# EAGLE board usb-c_dlt (EAGLE 9.4.2)
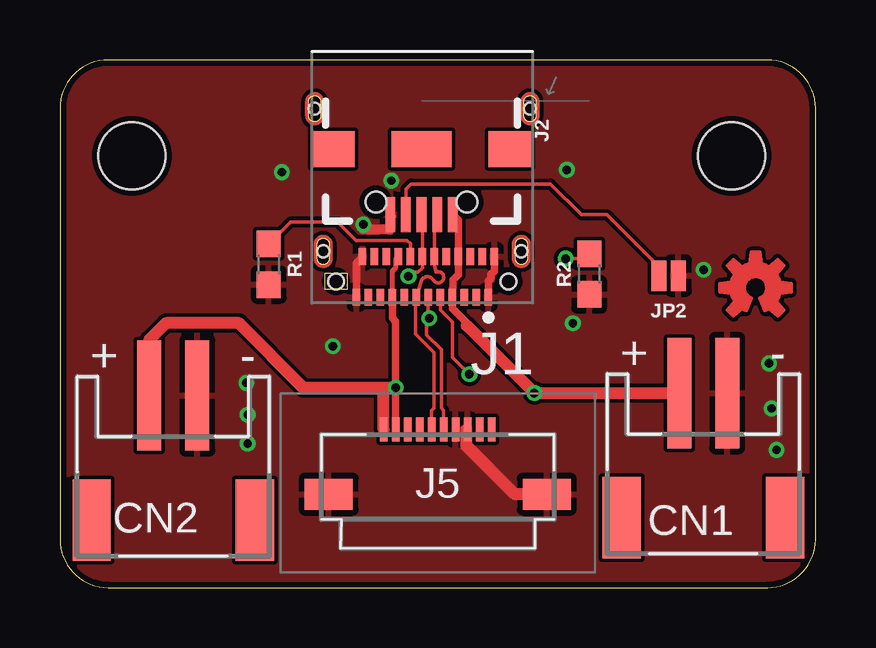
[diagram p0: board, top side]
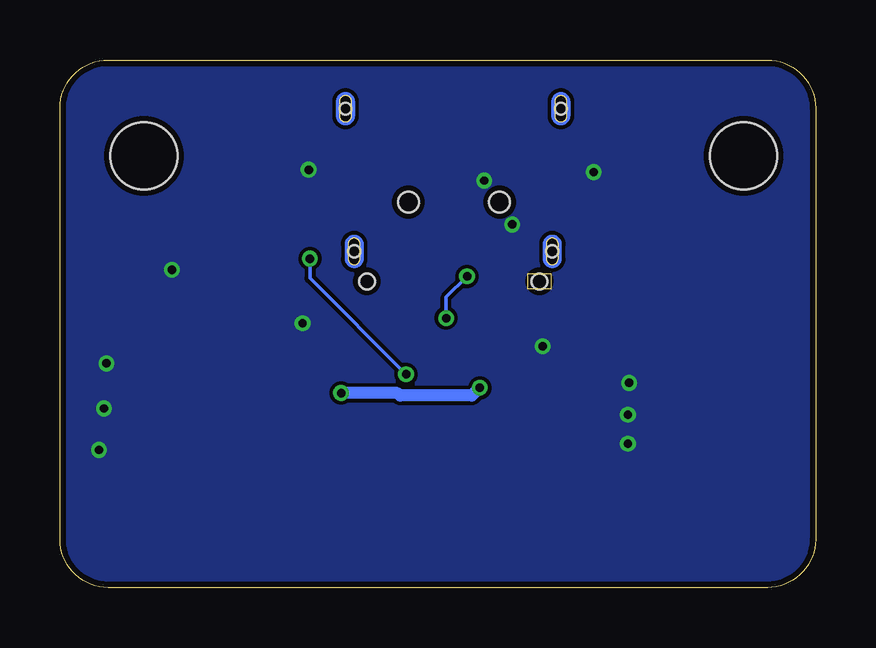
[diagram p1: board, bottom side, seen from below]

Size 31.5 x 22 mm. Coordinates in mm from the lower left corner, seen from the top.
Outline: 29.5,22 2,22 arc90 0,20 0,2 arc90 2,0 29.5,0 arc90 31.5,2 31.5,20 arc90 29.5,22
Copper layers (1*16): Top 0.035mm / dielectric 1.5mm / Bottom 0.035mm
Design rules "SeeedStudio_2layer_DRU_no_angle_20140221": minimum track width 6mil, minimum drill 12mil, track to track 6mil, track to pad 6mil, pad to pad 6mil, via to via 6mil, smd to smd 0mil, copper to edge 10mil, drill to drill 10mil, minimum pad ring 10mil, minimum via ring 6mil, stop-mask expansion 2mil, vias tented up to drill 100mil, thermal gap 10mil
Holes 2.8 mm at 3,18 28,18

## Footprints (pad centres in the part's own frame; a part is rotated, then mirrored left to right if it is on the bottom)
JST-PH-2-SMT-RA = smd 1 x 4.6: 1 1,-3.7; 2 -1,-3.7 | smd 1.6 x 3.4: NC1 -3.4,1.5; NC2 3.4,1.5
AMPHENOL_12401610E4#2A = smd 0.3 x 0.7: A1 -2.75,0.66; A2 -2.25,0.66; A3 -1.75,0.66; A4 -1.25,0.66; A5 -0.75,0.66; A6 -0.25,0.66; A7 0.25,0.66; A8 0.75,0.66; A9 1.25,0.66; A10 1.75,0.66; A11 2.25,0.66; A12 2.75,0.66; B1 2.5,-1.04; B2 2,-1.04; B3 1.5,-1.04; B4 1,-1.04; B5 0.5,-1.04; B6 0,-1.04; B7 -0.5,-1.04; B8 -1,-1.04; B9 -1.5,-1.04; B10 -2,-1.04; B11 -2.5,-1.04; B12 -3,-1.04 | hole 0.65: -3.6,0; 3.6,0 | hole 0.5: -4.13,-1.25; 4.13,-1.25; -4.49,-7.2; 4.49,-7.2
USB-B-MICRO-SMD = smd 1.45 x 0.4: D+ 2.725,0; D- 2.725,0.65; GND 2.725,-1.3; ID 2.725,-0.65; VBUS 2.725,1.3 | smd 1.5 x 1.8: SHIELD1 0,3.685; SHIELD2 0,-3.685 | smd 1.5 x 2.5: SHIELD3 0,0 | hole 0.85: 2.2,1.9; 2.2,-1.9
5051101092 = smd 0.3 x 1: 1 -2.25,2.475; 2 -1.75,2.475; 3 -1.25,2.475; 4 -0.75,2.475; 5 -0.25,2.475; 6 0.25,2.475; 7 0.75,2.475; 8 1.25,2.475; 9 1.75,2.475; 10 2.25,2.475 | smd 2 x 1.3: 11 -4.55,-0.225; 12 4.55,-0.225
SMT-JUMPER_2_NC_PASTE_NO-SILK = smd 0.635 x 1.27: 1 -0.406,0; 2 0.406,0
0603 = smd 1.1 x 1: 1 -0.85,0; 2 0.85,0

## Placement (x,y rotation side)
CN1  [JST-PH-2-SMT-RA]  26.82,4.41 180 top
CN2  [JST-PH-2-SMT-RA]  4.72,4.31 180 top
J1  12401610E4#2A  [AMPHENOL_12401610E4#2A]  15.11,12.77 180 top
J2  [USB-B-MICRO-SMD]  15.07,18.27 270 top
J5  505110-1092  [5051101092]  15.75,4.11 0 top
JP2  JUMPER-SMT_2_NC_PASTE_NO-SILK  [SMT-JUMPER_2_NC_PASTE_NO-SILK]  25.37,13 180 top
LOGO1  OSHW-LOGOS-COPPER  [OSHW-LOGO-S_COPPER]  29,12.5 0 top
R1  [0603]  8.7,13.48 270 top
R2  [0603]  22.07,13.07 90 top

## Library data of the parts
CN1 CN2 = adafruit
J1 = 12401610E4_2A; DESCRIPTION: Conn USB Type C Surface Mount Receptacle; DIGI-KEY_PART_NUMBER: 12401610E4#2ACT-ND; DIGI-KEY_PURCHASE_URL: https://www.digikey.fr/product-detail/en/amphenol-commercial-products/12401610E4-2A/12401610E4-2ACT-ND/5775520?WT.z_cid=ref_snapeda&utm_source=snapeda&utm_medium=aggregator&utm_campaign=buynow; MF: Amphenol; MP: 12401610E4#2A; PACKAGE: None
J2 = SparkFun-Connectors; PROD_ID: CONN-11752
J5 = SamacSys_Parts; DESCRIPTION: Molex Easy-On Series 0.5mm Pitch 10 Way Right Angle SMT Male FPC Connector, ZIF Bottom Contact; HEIGHT: 0mm; MANUFACTURER_NAME: Molex; MANUFACTURER_PART_NUMBER: 505110-1092; MOUSER_PART_NUMBER: 538-505110-1092; MOUSER_PRICE-STOCK: https://www.mouser.com/Search/Refine.aspx?Keyword=538-505110-1092
JP2 = SparkFun-Jumpers
LOGO1 = SparkFun-Aesthetics
R1 R2 = SparkFun-Resistors

## Nets
A0/CC2: J1.A5 R2.2
A3/CC1: J1.B5 R1.1
GND: CN1.2 CN2.2 J1.A1 J1.A12 J1.B1 J1.B12 J2.GND J5.7 J5.8 J5.11 J5.12 JP2.1 R1.2 R2.1
N$2: J2.ID JP2.2
USB0(OTG)_D_N: J1.A7 J1.B7 J2.D- J5.5
USB0(OTG)_D_P: J1.A6 J1.B6 J2.D+ J5.6
USB2_OTG_ID: J5.4
VBUS: CN1.1 CN2.1 J1.A4 J1.A9 J1.B4 J1.B9 J2.VBUS J5.1 J5.2

## Tracks (layer width: path | path; a pad name or v marks a point on that pad's centre or on a via)
A0/CC2  (via drill 0.35)
  Top 0.152: R2.2 21.86,13.72 v21.08,13.72 | J1.A5 15.86,11.58 16.36,11.07 16.36,9.6 v17.07,8.89
  Bottom 0.152: v21.08,13.72 21.08,12.9 v17.07,8.89
A3/CC1
  Top 0.152: J1.B5 14.61,14.35 14.48,14.48 12.34,14.48 11.58,15.24 9.62,15.24 R1.1
GND  (via drill 0.35)
  Top 0.305: J1.B1 12.36,13.56 J1.A12 | J1.A1 17.86,12.78 17.97,12.89 17.97,13.07 18.11,13.2 J1.B12
  Top 0.406: J2.GND 13.77,14.94 12.65,14.94 v12.65,15.14
  Top 0.508: 16.94,6.59 16.94,5.92 18.97,3.89 J5.12
  other vias: 13.82,16.97 7.82,5.99 7.82,7.21 7.77,8.53 29.87,5.74 29.67,7.47 29.57,9.35 26.84,13.25 21.39,11.02 11.38,10.06 21.13,17.42 9.25,17.32
  pour Top: -3,-2 -3,24 33.5,24 33.5,-2
  pour Bottom: -5,-3 -5,26 34.5,26 34.5,-3
N$2
  Top 0.152: J2.ID 14.42,16.61 14.65,16.83 20.46,16.83 21.74,15.54 22.81,15.54 24.97,13.39 JP2.2
USB0(OTG)_D_N
  Top 0.152: J2.D- 15.61,15.43 J1.B7 15.61,13.42 15.68,13.15 arc-264 15.57,12.82 arc140 15.05,12.74 J1.A7 | J1.A7 14.94,12.19 | J5.5 15.5,7.39 15.6,7.49 15.6,9.8 14.82,10.57 14.82,12.08 J1.A7
USB0(OTG)_D_P  (via drill 0.35)
  Top 0.152: J2.D+ 15.11,15.52 J1.B6 15.11,13.33 14.94,13.16 14.71,13.16 v14.53,12.98 | J1.A6 15.35,12.1 15.35,11.28 v15.4,11.23 15.29,11.12 15.29,10.54 15.9,9.93 15.9,7.49 16,7.39 J5.6
  Bottom 0.152: v15.4,11.23 15.4,12.11 v14.53,12.98
VBUS  (via drill 0.35)
  Top 0.203: J1.B4 14.01,13.71 14.01,13.35 13.86,13.2 J1.A9
  Top 0.305: J5.2 v14,8.33 14,11.1 13.86,11.24 J1.A9 | 16.97,10.92 16.97,11.02 16.36,11.63 J1.A4 16.36,12.48 16.38,12.5 16.38,12.82 16.61,13.05 J1.B9 16.61,15.32 J2.VBUS
  Top 0.508: 16.97,10.92 v19.78,8.11 CN1.1 | v14,8.33 13.41,8.33 | 13.41,8.33 10.16,8.33 7.47,11.02 4.42,11.02 3.72,10.33 CN2.1 | J5.1 13.5,8.24 13.41,8.33
  Bottom 0.508: v19.78,8.11 17.43,8.11 17.32,8 14.32,8 v14,8.33

## Text on the board
tStop: PWR/ / USB OTG